# Altium PCB solderStation.PcbDoc
Units mm, origin at the board's own origin, x right, y up, seen from the top; angles counter-clockwise.
Board outline 96 x 82 mm, 2 copper layers (Top Layer, Bottom Layer), stack 1.671 mm thick; 70 components, 77 nets, 218 pads, 10 vias.
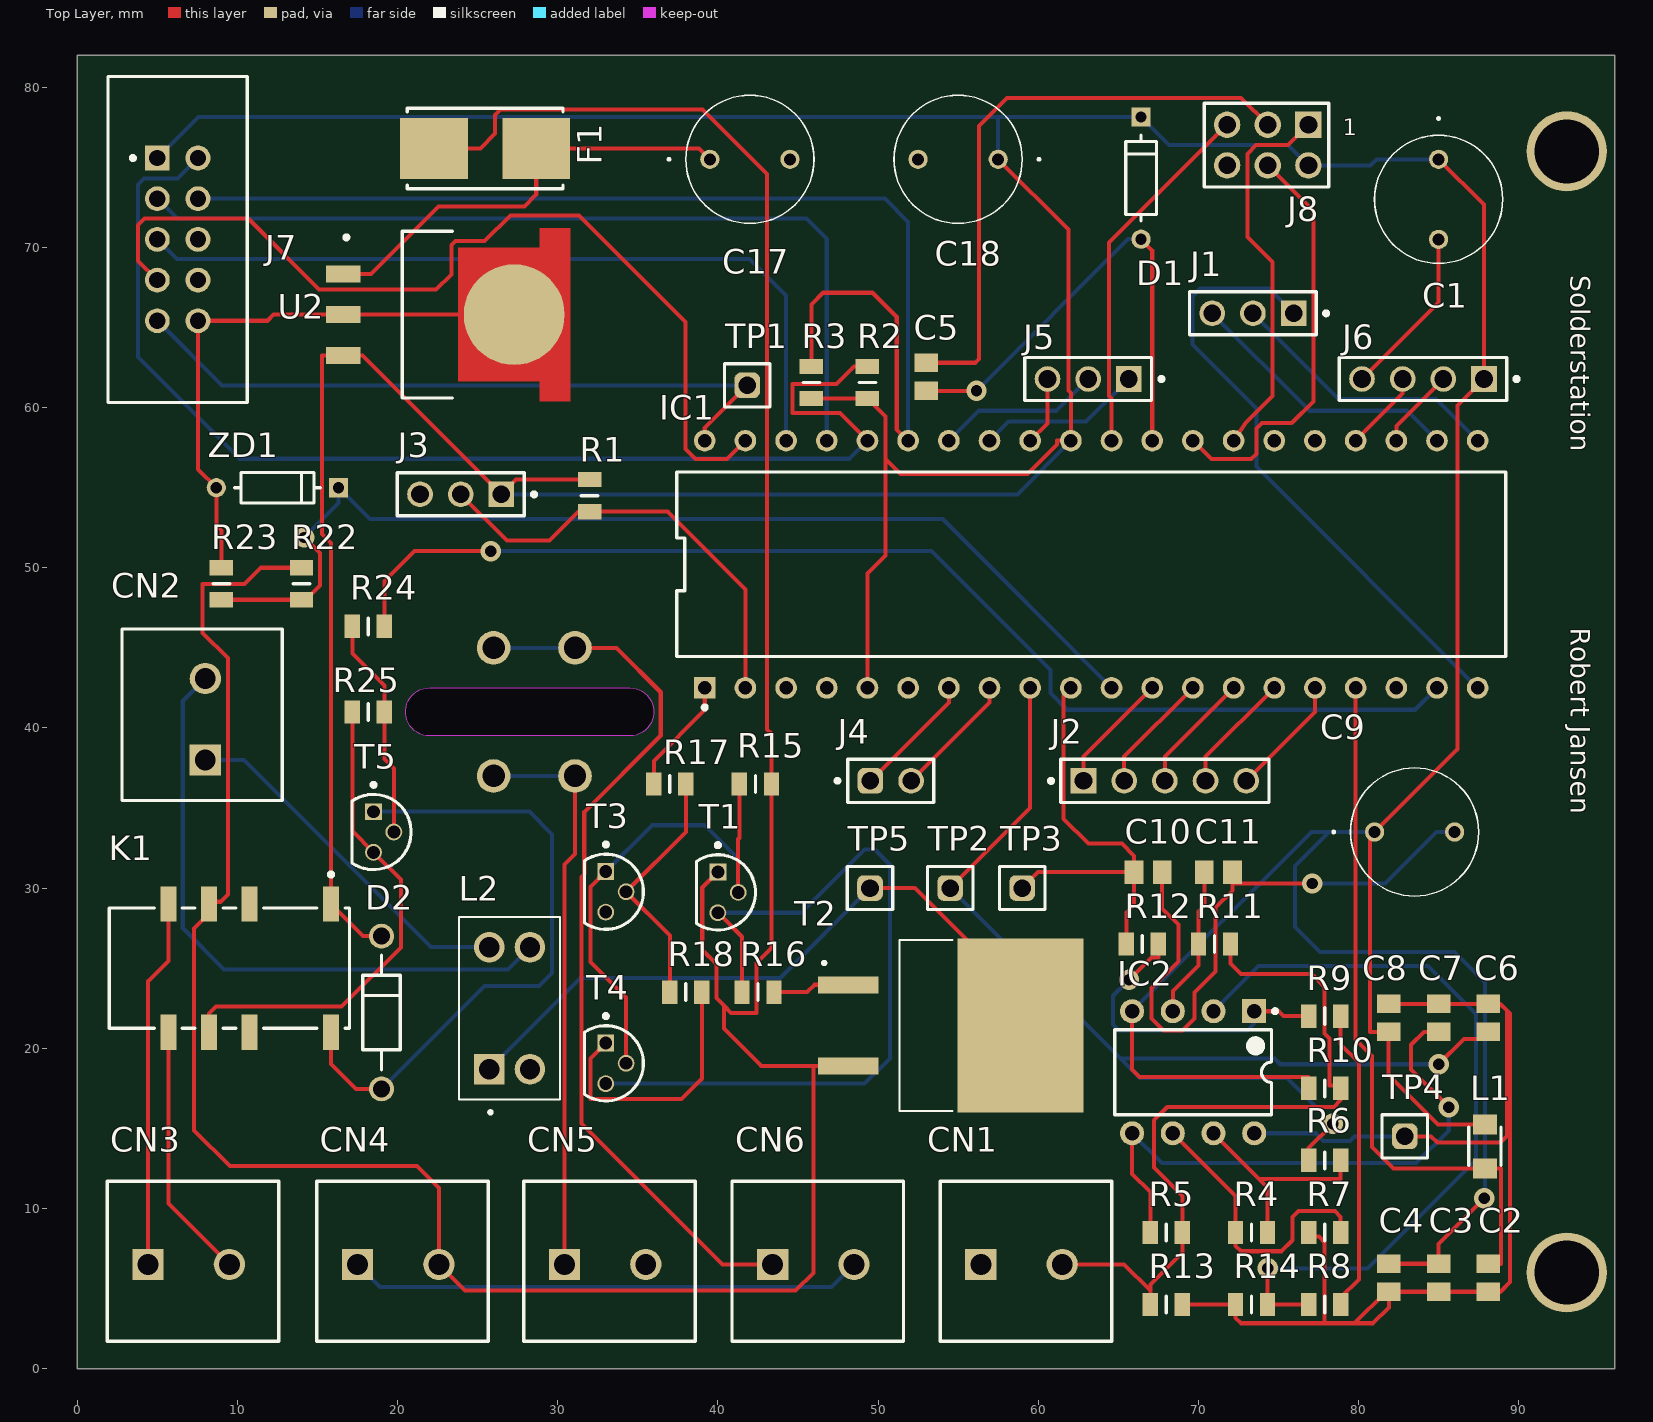
[diagram p0: Top Layer view]
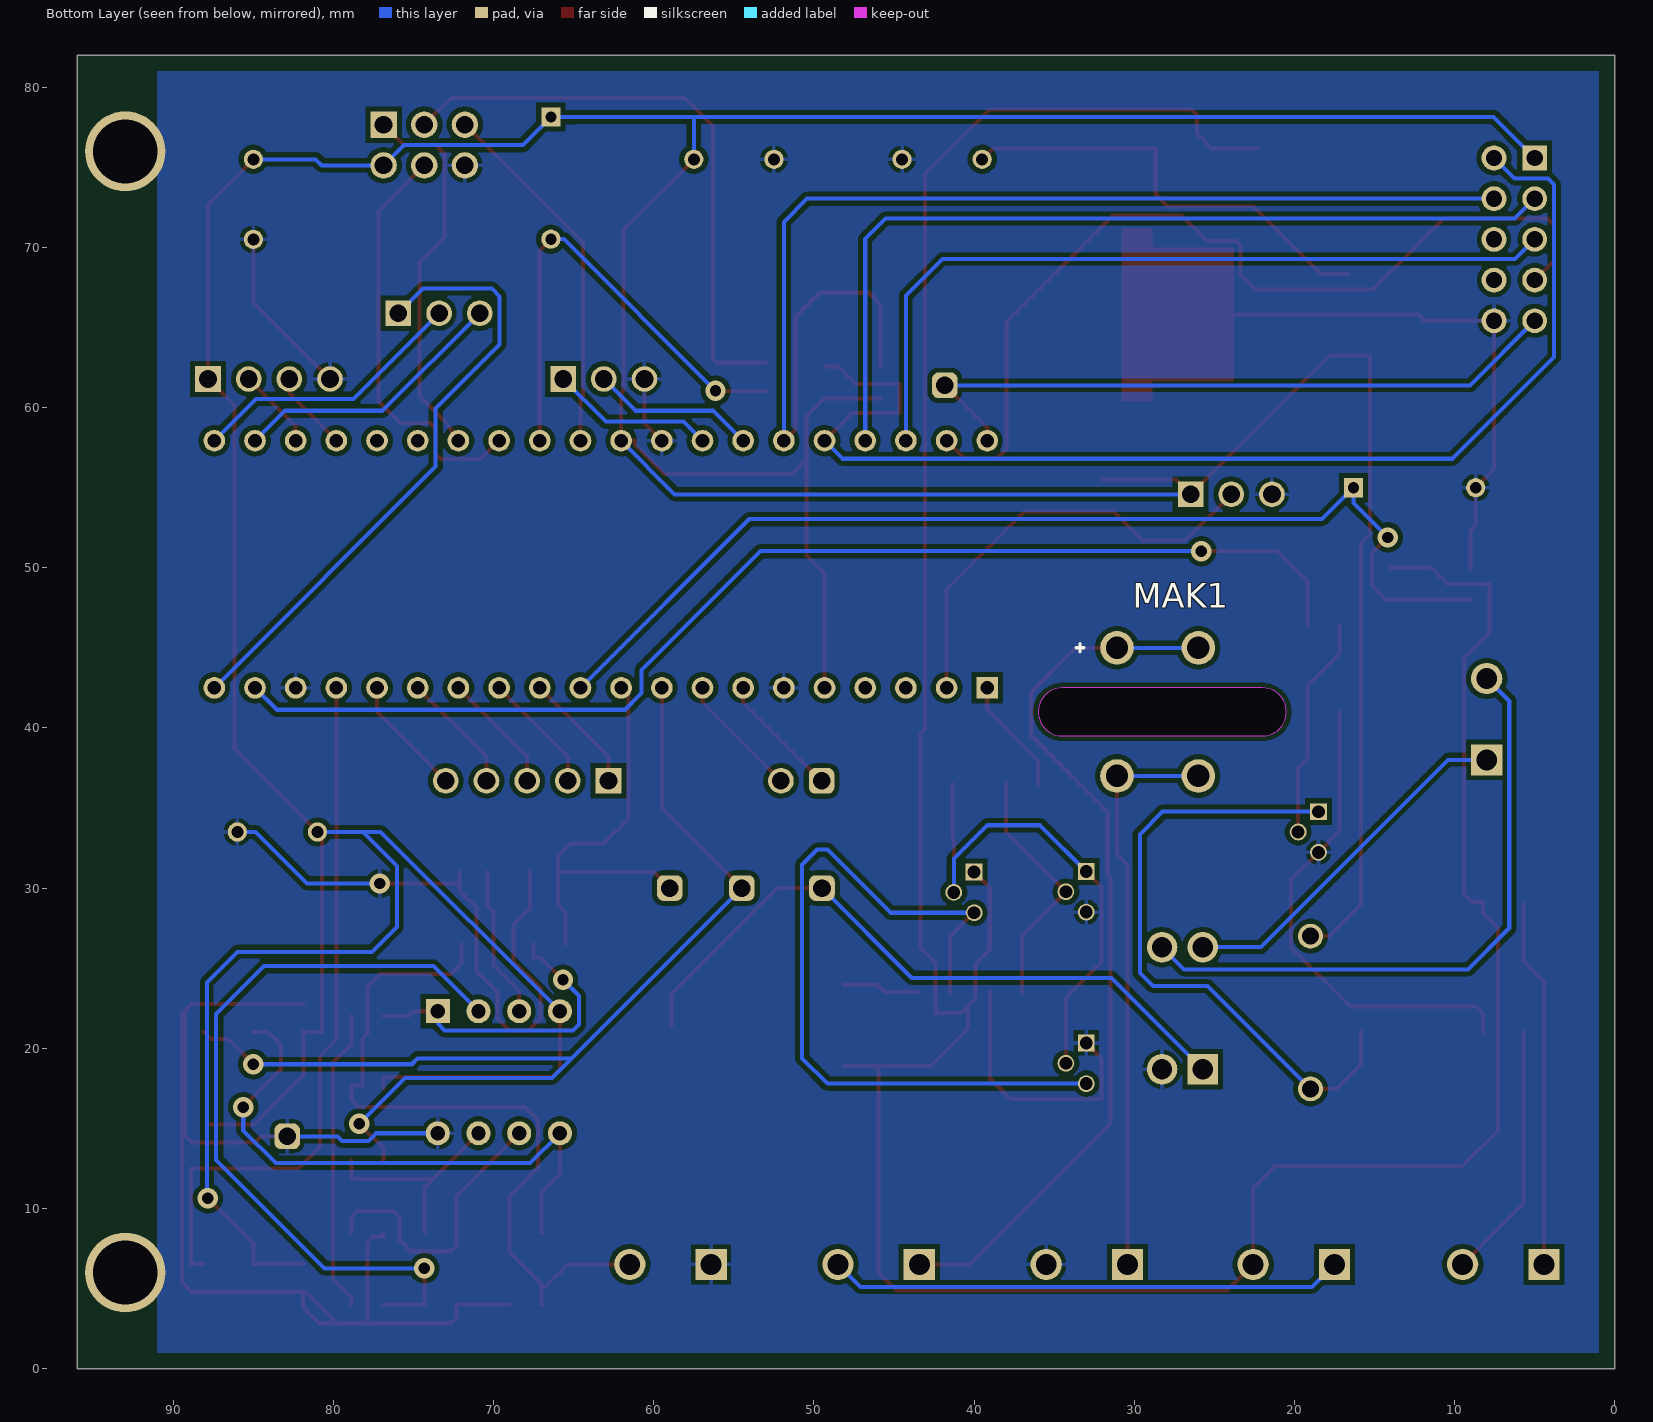
[diagram p1: Bottom Layer view, seen from below]

## Layer stack, top to bottom
Top Solder: solder mask 0.0102, Solder Resist, Dk 3.5
Top Layer: signal copper 0.0356
Dielectric 1: dielectric 1.6, FR-4, Dk 4.8
Bottom Layer: signal copper 0.0356
Bottom Solder: solder mask 0.0102, Solder Resist, Dk 3.5

## Board outline
0,82 96,82 96,0 0,0
cut-out: 22,39.5 cw(c22,41) 22,42.5 34.5,42.5 cw(c34.5,41) 34.5,39.5

## Design rules (kind name [scope] priority, off if disabled: settings)
Clearance [All] p1: gap=0.3 ignorepadtopadclearanceinfootprint=FALSE
Height [All] p1: minheight=0 maxheight=60 prefheight=12.7
HoleSize [All] p1: absolutevalues=TRUE maxlimit=5 minlimit=0.025 maxpercent=80.000 minpercent=20.000
PolygonConnect [All] p1: connectstyle=Relief reliefconductorwidth=0.254 reliefentries=4 polygonreliefangle="90 Angle" airgapwidth=0.254
RoutingVias [All] p1: holewidth=0.711 width=1.27 viastyle="Through Hole" minholewidth=0.711 minwidth=1.27 maxholewidth=0.711 maxwidth=1.27
SilkToSolderMaskClearance [IsPad] p1: minsilkscreentomaskgap=0.1 clearancetoexposedcopper=TRUE
SolderMaskExpansion [All] p1: expansion=0.102 istentingtop=FALSE
Width [All] p1: maxlimit=0.254 minlimit=0.254 preferedwidth=0.254
27 further rules are at their usual default settings.

## Classes and differential pairs
component class SolderIronTemp: C6 C7 C8 C9 C10 C11 CN1 IC2 R4 R5 R6 R7 R8 R9 R10 R11 R12 R13 R14 TP2 TP3 TP4
component class SolderIronOut: CN2 L2 R15 R16 R17 R18 T1 T2 T3 T4 TP5
component class CPU: C1 C2 C3 C4 C5 D1 IC1 J1 J2 J3 J4 J5 J6 J7 J8 L1 R1 R2 R3 TP1
component class BatterySource_RelaisOut: C17 C18 CN3 CN4 CN5 CN6 D2 F1 K1 MAK1 R22 R23 R24 R25 T5 U2 ZD1

## Components (designator, comment, footprint, x,y, rotation, side; value= is the part's Value field where it differs from the comment)
C1 "10µF 50V" TAP106M050BRW 85,75.5 r270 top
C2 "100nF" CAPC2012X88N 88.097,5.67 r90 top
C3 "100nF" CAPC2012X88N 85.018,5.67 r90 top
C4 "100nF" CAPC2012X88N 81.887,5.67 r90 top
C5 "10nF" CAPC2012X88N 53.004,61.922 r270 top
C6 "10nF" CAPC2012X88N 88.097,21.9 r270 top
C7 "10nF" CAPC2012X88N 85.018,21.9 r270 top
C8 "10nF" CAPC2012X88N 81.887,21.9 r270 top
C9 "10µF 50V" TAP106M050BRW 81,33.5 r0 top
C10 "10nF" CAPC2012X88N 66.858,31 r180 top
C11 "10nF" CAPC2012X88N 71.254,31 r180 top
C17 "100µF 25V" TAP106M050BRW 39.5,75.5 r0 top
C18 "10µF 50V" TAP106M050BRW 57.5,75.5 r180 top
CN1 "Printkroonsteen 2 POL" "PRINTKROONSTEEN 2PIN" 56.42,6.5 r0 top
CN2 "Printkroonsteen 2 POL" "PRINTKROONSTEEN 2PIN" 8,38 r90 top
CN3 "Printkroonsteen 2 POL" "PRINTKROONSTEEN 2PIN" 4.42,6.5 r0 top
CN4 "Printkroonsteen 2 POL" "PRINTKROONSTEEN 2PIN" 17.5,6.5 r0 top
CN5 "Printkroonsteen 2 POL" "PRINTKROONSTEEN 2PIN" 30.42,6.5 r0 top
CN6 "On/Off Switch" "PRINTKROONSTEEN 2PIN" 43.42,6.5 r0 top
D1 "1N4148" FP-017AG-MFG 66.425,78.139 r270 top
D2 "1N4007" "DIODE 1N4007 ONSC-AXIAL_LEAD-2-59-10_P" 19,27 r270 top
F1 "3A" FP-0154-MFG 25.474,76.173 r0 top
IC1 "ATMEGA4809-PF" ATMEGA4809-PF 63.31,50.215 r90 top
IC2 "MCP6002-I/P" PDIP300-P8 69.675,18.5 r270 top
J1 "61300311121" "PIN HEADER 1X3" 73.406,65.888 r180 top
J2 "61300511121" "PIN HEADER 1X5" 67.909,36.695 r0 top
J3 "61300311121" "PIN HEADER 1X3" 23.946,54.585 r180 top
J4 "61300211121" 61300211121 50.793,36.695 r0 top
J5 "61300311121" "PIN HEADER 1X3" 63.123,61.784 r180 top
J6 "UART2" "PIN HEADER 1X4" 84.025,61.784 r180 top
J7 "1-1634688-0" TECO-1-1634688-0-10_V 6.27,70.5 r270 top
J8 "61300621121" "PIN HEADER 2X6" 74.333,76.389 r180 top
K1 "G6S-2F-DC5" FP-G6S-2F-DC5-MFG 9.5,25 r180 top
L1 "10uH" SMD-1008 87.887,13.875 r90 top
L2 "CM2545X171B-10" XFMR_CM2545X171B-10 27,22.5 r90 top
MAK1 "Makita battery source" "MAKITA FOODPRINT FEMALE SPADE FOR PCD" 28.565,45 r180 bottom
R1 "4K7" RESC2012X50N 32,54.5 r270 top
R2 "4K7" RESC2012X50N 49.333,61.564 r270 top
R3 "4K7" RESC2012X50N 45.833,61.564 r270 top
R4 "18K" RESC2012X50N 73.325,8.5 r180 top
R5 "5K6" RESC2012X50N 68,8.5 r0 top
R6 "5K6" RESC2012X50N 77.887,13 r0 top
R7 "100E" RESC2012X50N 77.887,8.5 r0 top
R8 "18K" RESC2012X50N 77.887,4 r180 top
R9 "18K" RESC2012X50N 77.887,22 r0 top
R10 "1M" RESC2012X50N 77.887,17.5 r180 top
R11 "5K6" RESC2012X50N 71,26.5 r0 top
R12 "5K6" RESC2012X50N 66.5,26.5 r0 top
R13 "10M" RESC2012X50N 68,4 r180 top
R14 "100E" RESC2012X50N 73.325,4 r0 top
R15 "4K7" RESC2012X50N 42.342,36.5 r0 top
R16 "100E" RESC2012X50N 42.5,23.5 r180 top
R17 "10K" RESC2012X50N 37,36.5 r180 top
R18 "4K7" RESC2012X50N 38,23.5 r180 top
R22 "6K8" RESC2012X50N 13.998,49 r270 top
R23 "10K" RESC2012X50N 9,49 r90 top
R24 "10K" RESC2012X50N 18.175,46.345 r180 top
R25 "4K7" RESC2012X50N 18.175,40.996 r180 top
T1 "BC547B" ONSC-TO-92-3-29-11 40,29.73 r270 top
T2 "IRF9Z34SPBF" TO254P1521X483-4N 54.539,21.422 r0 top
T3 "BC547B" ONSC-TO-92-3-29-11 33,29.77 r270 top
T4 "BC557BTF" ONSC-TO-92-3-29-11 33,19.058 r270 top
T5 "BC547B" ONSC-TO-92-3-29-11 18.5,33.5 r270 top
TP1 "TestPoint" 61300111121 41.833,61.389 r0 top
TP2 "TestPoint" 61300111121 54.5,30 r0 top
TP3 "TestPoint" 61300111121 59,30 r0 top
TP4 "TestPoint" 61300111121 82.887,14.5 r0 top
TP5 "TestPoint" 61300111121 49.5,30 r0 top
U2 "LM7805SX/NOPB" FP-KTT0003B-MFG 23.154,65.8 r270 top
ZD1 "5V1" "ZENERDIODE TH" 12.5,55 r180 top

## Footprints (in the part's own frame and the unit in brackets; to place one, negate y for a bottom-side part, rotate by r counter-clockwise, add the part's x,y. Pads: shape width x height; smd on the part's side, far side on the other; paste and mask are expansions set on the pad)
61300111121 [mm] "Pin Header, pitch 2.54 mm, THT, Vertical, single row, 1p"
  rrect50% 1.6x1.6 hole 1.1: 1(0,0)
  silkscreen extent -1.42,-1.35 1.42,1.34, body extent -1.27,-1.27 1.27,1.27, height 8.57
61300211121 [mm] "Pin Header, pitch 2.54 mm, THT, Vertical, single row, 2p"
  rrect50% 1.6x1.6 hole 1.1: 1(-1.27,0)
  round 1.6 hole 1.1: 2(1.27,0)
  silkscreen extent -3.44,-1.34 2.69,1.35, body extent -2.54,-1.27 2.54,1.27, height 8.57
ATMEGA4809-PF [mm] "FP TH gebruikmaken van socket voor op PCB"
  rect 1.35x1.35 hole 0.85 paste-2539.97 mask+0: 1(-7.715,24.13)
  round 1.35 hole 0.85 paste-2539.97 mask+0: 2(-7.715,21.59) 3(-7.715,19.05) 4(-7.715,16.51) 5(-7.715,13.97) 6(-7.715,11.43) 7(-7.715,8.89) 8(-7.715,6.35) 9(-7.715,3.81) 10(-7.715,1.27) 11(-7.715,-1.27) 12(-7.715,-3.81) 13(-7.715,-6.35) 14(-7.715,-8.89) 15(-7.715,-11.43) 16(-7.715,-13.97) 17(-7.715,-16.51) 18(-7.715,-19.05) 19(-7.715,-21.59) 20(-7.715,-24.13) 21(7.715,-24.13) 22(7.715,-21.59) 23(7.715,-19.05) 24(7.715,-16.51) 25(7.715,-13.97) 26(7.715,-11.43) 27(7.715,-8.89) 28(7.715,-6.35) 29(7.715,-3.81) 30(7.715,-1.27) 31(7.715,1.27) 32(7.715,3.81) 33(7.715,6.35) 34(7.715,8.89) 35(7.715,11.43) 36(7.715,13.97) 37(7.715,16.51) 38(7.715,19.05) 39(7.715,21.59) 40(7.715,24.13)
  silkscreen extent -9.07,-25.88 5.76,25.88, body extent -8.49,-26.71 8.49,26.71, height 0.25
CAPC2012X88N [mm]
  rect 1.16x1.47 smd: 1(-0.875,0) 2(0.875,0)
  body extent -1.02,-0.64 1.02,0.64, height 1.4
"DIODE 1N4007 ONSC-AXIAL_LEAD-2-59-10_P" [mm] "AXIAL, 2-Leads, Diameter 2.35mm"
  round 1.55 hole 1.05: 1(0,0) 2(9.54,0)
  silkscreen extent 1.17,-1.18 8.37,1.17
FP-017AG-MFG [mm]
  rect 1.2x1.2 hole 0.7 paste-2539.97 mask+0: 1(0,0)
  round 1.2 hole 0.7 paste-2539.97 mask+0: 2(7.626,0)
  silkscreen extent 1.13,-0.95 6.49,0.95, body extent -0.7,-1.05 8.33,1.05, height 0.25
FP-0154-MFG [mm]
  rect 4.24x3.81 smd paste+0 mask+0: 1(-3.185,0) 2(3.185,0)
  silkscreen extent -4.87,-2.51 4.87,2.52, body extent -5.41,-2.62 5.41,2.62, height 0.25
FP-G6S-2F-DC5-MFG [mm]
  rect 1x2.2 smd paste+0 mask+0: 1(-6.35,-4) 3(-1.27,-4) 4(1.27,-4) 5(3.81,-4) 8(3.81,4) 9(1.27,4) 10(-1.27,4) 12(-6.35,4)
  silkscreen extent -7.5,-5.97 7.5,3.75, body extent -7.6,-5.2 7.6,5.2, height 0.25
FP-KTT0003B-MFG [mm]
  rect 1.07x2.16 smd paste+0 mask+0: 1(-2.54,-6.545) 2(0,-6.545) 3(2.54,-6.545)
  round 6.291 smd paste+0 mask+0: 4(0,4.13)
  Top Layer region: 5.4,7.625 -5.4,7.625 -5.4,5.715 -4.165,5.715 -4.165,0.635 4.165,0.635 4.165,5.715 5.4,5.715
  silkscreen extent -5.21,-6.47 5.21,0.26, body extent -5.5,-7.73 5.5,7.73, height 0.25
"MAKITA FOODPRINT FEMALE SPADE FOR PCD" [mm] "foodprint of 2 spades used for makita terminal"
  round 2.1 hole 1.4: 1(-2.515,0) 2(2.565,0) 3(2.565,-8) 4(-2.515,-8)
  silkscreen extent -5.08,-0.25 -4.58,0.25, body extent -3.72,-10.54 3.8,2.34, height 9.39
ONSC-TO-92-3-29-11 [mm] "TO, 3-Leads, Body Dia 4.7mm, Pitch 1.27mm"
  rect 1.05x1.05 hole 0.8: 1(-1.27,0)
  round 1.05 hole 0.8: 2(0,1.27) 3(1.27,0)
  silkscreen extent -3.07,-1.34 2.35,2.35, body extent -2.35,-1.33 2.36,2.36, height 7.87
PDIP300-P8 [mm] "8-Pin Plastic Dual In-Line Package (PDIP)"
  rect 1.5x1.5 hole 0.9: 1(-3.81,3.81)
  round 1.5 hole 0.9: 2(-3.81,1.27) 3(-3.81,-1.27) 4(-3.81,-3.81) 5(3.81,-3.81) 6(3.81,-1.27) 7(3.81,1.27) 8(3.81,3.81)
  silkscreen extent -3.93,-4.9 2.65,5.24, body extent -3.55,-4.9 3.55,4.9, height 4.32
"PIN HEADER 1X3" [mm] "Pin Header, pitch 2.54 mm, THT, Vertical, single row, 3p"
  rect 1.6x1.6 hole 1.1: 1(-2.54,0)
  round 1.6 hole 1.1: 2(0,0) 3(2.54,0)
  silkscreen extent -4.7,-1.34 3.96,1.35, body extent -3.81,-1.27 3.81,1.27, height 8.57
"PIN HEADER 1X4" [mm] "Pin Header, pitch 2.54 mm, THT, Vertical, single row, 4p"
  rect 1.6x1.6 hole 1.1: 1(-3.81,0)
  round 1.6 hole 1.1: 2(-1.27,0) 3(1.27,0) 4(3.81,0)
  silkscreen extent -5.97,-1.35 5.23,1.35, body extent -5.08,-1.27 5.08,1.27, height 8.57
"PIN HEADER 1X5" [mm] "Pin Header, pitch 2.54 mm, THT, Vertical, single row, 5p"
  rect 1.6x1.6 hole 1.1: 1(-5.08,0)
  round 1.6 hole 1.1: 2(-2.54,0) 3(0,0) 4(2.54,0) 5(5.08,0)
  silkscreen extent -7.24,-1.34 6.5,1.35, body extent -6.35,-1.27 6.35,1.27, height 8.57
"PIN HEADER 2X6" [mm] "Pin Header, pitch 2.54 mm, THT, Vertical, dual row, 6p"
  rect 1.65x1.65 hole 1.1: 1(-2.54,-1.27)
  round 1.65 hole 1.1: 2(-2.54,1.27) 3(0,-1.27) 4(0,1.27) 5(2.54,-1.27) 6(2.54,1.27)
  silkscreen extent -3.81,-2.62 3.96,2.61, body extent -3.81,-2.54 3.81,2.54, height 8.59
"PRINTKROONSTEEN 2PIN" [mm] "printkroonsteen 2pin 1716020000"
  rect 1.95x1.95 hole 1.3: 1(0,0)
  round 1.95 hole 1.3: 2(5.08,0)
  silkscreen extent -2.54,-4.8 8.17,5.2, body extent -2.54,-4.8 8.17,5.2, height 13.8
RESC2012X50N [mm]
  rect 0.95x1.45 smd: 1(-1,0) 2(1,0)
  silkscreen extent 0,-0.53 0,0.52, body extent -1.02,-0.63 1.02,0.63, height 0.5
SMD-1008 [mm] "Chip Inductor, 2-Leads, Body 2.5 x 2.0 mm"
  rect 1.25x1.5 smd: 1(-1.375,0) 2(1.375,0)
  silkscreen extent -1.2,-1 1.2,1, body extent -1.25,-1 1.25,1, height 0.89
TAP106M050BRW [mm]
  round 1.2 hole 0.75: 1(0,0) 2(5,0)
  silkscreen extent -2.6,-4 6.5,4
TECO-1-1634688-0-10_V [mm] "10-Pin Connector, Body 20.35x8.7mm, Pitch 2.54mm"
  rect 1.55x1.55 hole 1.02: 1(-5.08,-1.27)
  round 1.55 hole 1.02: 2(-5.08,1.27) 3(-2.54,-1.27) 4(-2.54,1.27) 5(0,-1.27) 6(0,1.27) 7(2.54,-1.27) 8(2.54,1.27) 9(5.08,-1.27) 10(5.08,1.27)
  silkscreen extent -10.18,-4.35 10.18,4.35, body extent -10.17,-4.35 10.18,4.65, height 9
TO254P1521X483-4N [mm]
  rect 3.78x1.06 smd: 1(-6.4,2.54) 3(-6.4,-2.54)
  rect 7.88x10.84 smd paste-6: 4(4.35,0)
  silkscreen extent -8,-5.34 0.1,5.34
XFMR_CM2545X171B-10 [mil]
  rect 75x75 hole 50: 1(-150,50)
  round 75 hole 50: 2(-150,-50) 3(150,-50) 4(150,50)
  silkscreen extent -260,-124 224,124, body extent -224,-124 224,124, height 374
"ZENERDIODE TH" [mm] "zenerdiode TH 500mW"
  rect 1.2x1.2 hole 0.7 paste-2539.97 mask+0: 1(-3.813,0)
  round 1.2 hole 0.7 paste-2539.97 mask+0: 2(3.813,0)
  silkscreen extent -2.68,-0.96 2.68,0.96, body extent -4.51,-1.05 4.51,1.05, height 0.25

## Part data
C1 C9 C17 C18: library part "capacitor THT radial tantalum", "Tantalum Capacitors - Solid Leaded 50V 10uF 20% ESR=1.6 Ohm TAP106M050BRW", Manufacturer_Name="Kyocera AVX", Manufacturer_Part_Number=TAP106M050BRW, Mouser Part Number=581-TAP106M050BRW, Datasheet Link=https://www.mouser.be/datasheet/2/40/tap-776819.pdf, Geometry.Height=15.5mm, Mouser Price/Stock=https://www.mouser.co.uk/ProductDetail/AVX/TAP106M050BRW?qs=GjEaAqXp9rZGx11KfVU76g%3D%3D
C2 C3 C4 C5 C6 C7 C8 C10 C11: library part "Capacitor ceramic 0805", Manufacturer=Kemet, Part Number=C0402C104K4RACTU
CN1 CN2 CN3 CN4 CN5 CN6: library part "printkroonsteen 1 X 2", "Printkroonsteen 2 PO L1716020000", Manufacturer_Name=Weidmuller, Manufacturer_Part_Number=1716020000, Mouser Part Number=470-1716020000, Datasheet Link=https://catalog.weidmueller.com/catalog/Start.do?ObjectID=1716020000&_ga=2.21797499.1716783809.1613378202-511725545.1613378202, Mouser Price/Stock=https://www.mouser.co.uk/ProductDetail/Weidmuller/1716020000?qs=WJDKaGZ8K%252B7GSEFQgvMjVA%3D%3D
D1: library part "D 1N4148", "DIODE GEN PURP 100V 200MA DO35", Average Rectified Current=200mA, Capacitance=4pF, Case/Package=DO-35, Current=4A, Forward Current=300mA, Forward Voltage=1V, Max Forward Surge Current (Ifsm)=1A, Max Operating Temperature=175°C, Max Power Dissipation=500mW, Max Repetitive Reverse Voltage (Vrrm)=100V, Max Reverse Current=5uA, Min Operating Temperature=-65°C, Package Quantity=2000, Contact Plating=Tin, Current Rating=200mA, Diameter=1.91mm, Element Configuration=Single, Height=4.56mm, Lead Free="Lead Free", Length=4.56mm, Max Reverse Voltage (DC)=100V, Max Surge Current=4A, Mount="Through Hole", Number of Pins=2, Output Current=200mA, Outside Diameter=1.85mm, Packaging=Bulk, Peak Non-Repetitive Surge Current=4A, Polarity=Standard, Power Dissipation=500mW, Radiation Hardening=No, REACH SVHC="No SVHC", Recovery Time=4ns, Reverse Recovery Time=4ns, Reverse Voltage=100V, Series=-, Voltage=100V, Voltage Rating (DC)=100V, Weight=0.01lb, Width=1.91mm
D2: library part "DIODE 1N4007", "DIODE 1N4007 1A 1000V", Manufacturer="On Semiconductor", ComponentLink1Description="Manufacturer URL", ComponentLink1URL=http://www.onsemi.com/, ComponentLink2Description=Datasheet, ComponentLink2URL=http://www.onsemi.com/pub_link/Collateral/1N4001-D.PDF, ComponentLink3Description="Package Specification", ComponentLink3URL=http://www.onsemi.cn/pub_link/Collateral/59-10.PDF, DatasheetVersion="Rev. 13", IFSM Max (A)=30, IO(rec) Max (A)=1, Mounting Technology="Through Hole", PackageDescription="2-Pin, Axial Lead, Diameter 2.35 mm", PackageReference=AXIAL_LEAD-2-59-10, PackageVersion="Rev. U, 02/2005", Packing="Bulk Bag", PartNumber=1N4007, RoHS=TRUE, Type="Standard Recovery", VRRM Max (V)=1000
F1: library part Fuse, "FUSE BRD MNT 4A 125VAC/VDC 2SMDCMP-08605-000003-1", Fuse Current=4A, Manufacturer=Littelfuse, Manufacturer Part Number=0154004.DR, Max Fuse Ac Voltage=125V, Package=0154, Temperature="-55°C to +125°C", Temperature Range High=+125°C, Temperature Range Low=-55°C, Automotive=No, Category=Fuse, ComponentLink2Description=Datasheet, ComponentLink2URL=https://www.littelfuse.com/~/media/electronics/datasheets/fuses/littelfuse_fuse_154_154t_154l_154tl_datasheet.pdf.pdf, Device Class L1="Circuit Protection", Device Class L2=Fuses, Device Class L3=unset, Digikey Description="FUSE BRD MNT 4A 125VAC/VDC 2SMD", Fuse Blow Speed=Fast, Height=3.81mm, Lead Free=Yes, Max Fuse Dc Voltage=125V, Mouser Description="Surface Mount Fuses Fuseblock w/ fuse 4A OMNI BLOK 154", Octopart=https://octopart.com/0154004.dr-littelfuse-565861, RoHS=TRUE
IC1: "IC MCU 8BIT 48KB FLASH 40DIP", RoHS Compliant=Yes
IC2: library part CMP-0187-00119-3, "Dual opamp", Case/Package=PDIP, Input Bias Current=1pA, Input Offset Voltage (Vos)=4.5mV, Max Frequency=1kHz, Max Input Voltage=6V, Max Operating Temperature=85°C, Min Input Voltage=1.8V, Min Operating Temperature=-40°C, Nominal Supply Current=100uA, Operating Supply Voltage=5.5V, Output Current=23mA, Package Quantity=60, Power Supply Rejection Ratio (PSRR)=86dB, Voltage Gain=112dB, Amplifier Type="GENERAL PURPOSE", Bandwidth=1MHz, Common Mode Rejection Ratio=60dB, Gain Bandwidth Product=1MHz, Height=0.195inch, Input Offset Voltage-Max=4.5mV, Lead Free="Lead Free", Length=0.4inch, Max Supply Voltage=6V, Min Supply Voltage=1.8V, Mount="Through Hole", Number of Amplifiers=2, Number of Channels=2, Number of Circuits=2, Number of Elements=2, Number of Pins=8, Operating Supply Current=100uA, Output Current per Channel=23mA, Packaging=Rail/Tube, Radiation Hardening=No, REACH SVHC="No SVHC", RoHS Compliant=Yes, Slew Rate=0.6V/µs, Slew Rate-Nom=0.6V/µs, Supply Current=100uA, Technology=CMOS, Unity Gain Bandwidth Product=1MHz, Width=0.28inch
J1 J3: library part "pin header 1x3pin right connection", "THT Vertical Pin Header WR-PHD, Pitch 2.54 mm, Single Row, 3 pins", Contact Resistance=20mOhm, Manufacturer="Wurth Elektronik", Operating Temperature=-40to105degC, Rated Current=3A, Withstanding Voltage=500VAC, Working Voltage=250VAC, Datasheet URL=https://katalog.we-online.de/em/datasheet/6130xx11121.pdf, Gender=Male, Manufacturer URL=http://www.we-online.de, Mounting Technology=THT, Orientation=Vertical, Package Reference=61300311121, Packaging=Bag, Part Number=61300311121, Pin Number=3, Pitch=2.54mm, Publisher=WurthElektronik, Row Number=Single
J2: library part "pin header 1x5", "THT Vertical Pin Header WR-PHD, Pitch 2.54 mm, Single Row, 5 pins", Contact Resistance=20mOhm, Manufacturer="Wurth Elektronik", Operating Temperature=-40to105degC, Rated Current=3A, Withstanding Voltage=500VAC, Working Voltage=250VAC, Datasheet URL=https://katalog.we-online.de/em/datasheet/6130xx11121.pdf, Gender=Male, Manufacturer URL=http://www.we-online.de, Mounting Technology=THT, Orientation=Vertical, Package Reference=61300511121, Packaging=Bag, Part Number=61300511121, Pin Number=5, Pitch=2.54mm, Publisher=WurthElektronik, Row Number=Single
J4: library part "Pin header 1X2 right connection", "THT Vertical Pin Header WR-PHD, Pitch 2.54 mm, Single Row, 2 pins", Color=Black, Contact Resistance=20mΩ, Current Rating=3A, Max Operating Temperature=125°C, Min Operating Temperature=-40°C, Operating Supply Voltage=250V, Connector Type="Male Pin", Contact Gender=Male, Contact Material=Copper, Contact Mating Length=5.9944mm, Contact Plating=Gold, Gender=Male, Height=8.94mm, Housing Material=PBT, Lead Free="Lead Free", Lead Pitch=2.54mm, Mount="Through Hole", NexarPartId=20081794, Number of Contacts=2, Number of Pins=2, Number of Positions=2, Number of Rows=1, Orientation=Vertical, Packaging=Bulk, Pitch=2.54mm, REACH SVHC="No SVHC", RoHS=Compliant, Termination="Through Hole", Voltage Rating=250V
J5: library part "pin header 1x3pin", "THT Vertical Pin Header WR-PHD, Pitch 2.54 mm, Single Row, 3 pins", Contact Resistance=20mOhm, Manufacturer="Wurth Elektronik", Operating Temperature=-40to105degC, Rated Current=3A, Withstanding Voltage=500VAC, Working Voltage=250VAC, Datasheet URL=https://katalog.we-online.de/em/datasheet/6130xx11121.pdf, Gender=Male, Manufacturer URL=http://www.we-online.de, Mounting Technology=THT, Orientation=Vertical, Package Reference=61300311121, Packaging=Bag, Part Number=61300311121, Pin Number=3, Pitch=2.54mm, Publisher=WurthElektronik, Row Number=Single
J6: library part "pin header 1x4 right connection", "THT Vertical Pin Header WR-PHD, Pitch 2.54 mm, Single Row, 4 pins", Contact Resistance=20mOhm, Manufacturer="Wurth Elektronik", Operating Temperature=-40to105degC, Package Reference=61300411121, Rated Current=3A, Withstanding Voltage=500VAC, Working Voltage=250VAC, Datasheet URL=https://katalog.we-online.de/em/datasheet/6130xx11121.pdf, Gender=Male, Manufacturer URL=http://www.we-online.de, Mounting Technology=THT, Orientation=Vertical, Packaging=Bag, Part Number=61300411121, Pin Number=4, Pitch=2.54mm, Publisher=WurthElektronik, Row Number=Single
J7: library part CMP-2000-05854-1, "Male Header, Pitch 2.54 mm, 2 x 5 Postion, Height 9.15 mm, Tail Length 3.2 mm, -40 to 105 degC, RoHS, Bulk", Manufacturer="TE Connectivity", Package Description="10-Pin Connector, Body 20.35 x 8.7 mm, Pitch 2.54 mm", Package Version="Rev. C2, 02/2011", Contact Material=Brass, Contact Plating=GoldPlatedContacts, Contact Termination Type=ThroughHole, Datasheet URL=https://datasheet.ciiva.com/6831/eng-cd-1634688-c2-6831201.pdf, Datasheet Version="Rev. C2, 02/2011", Gender=Header, Manufacturer URL=http://www.te.com/, Mounting Technology=ThroughHole, No. of Contacts=10Contacts, No. of Positions=10, No. of Rows=2, Orientation=Straight, Package Reference=1-1634688-0, Package URL=https://datasheet.ciiva.com/6831/eng-cd-1634688-c2-6831201.pdf, PartNumber=1-1634688-0, Pitch=2.54mm, Pitch Spacing=2.54mm, Product Range=-, SVHC=ToBeAdvised
J8: library part "pin header 2x6", "THT Vertical Pin Header WR-PHD, Pitch 2.54 mm, Dual Row, 6 pins", Contact Resistance=20mOhm, Manufacturer="Wurth Elektronik", Operating Temperature=-40to105degC, Rated Current=3A, Withstanding Voltage=500VAC, Working Voltage=250VAC, Datasheet URL=https://katalog.we-online.de/em/datasheet/6130xx21121.pdf, Gender=Male, Manufacturer URL=http://www.we-online.de, Mounting Technology=THT, Orientation=Vertical, Package Reference=61300621121, Packaging=Bag, Part Number=61300621121, Pin Number=6, Pitch=2.54mm, Publisher=WurthElektronik, Row Number=Dual
K1: library part "relais 5V 2A", "RELAY TELECOM DPDT 2A 5V DCCMP-08823-000012-1", Ambient Temperature Range High=+85°C, Ambient Temperature Range Low=-40°C, Coil Current=28.1mA, Coil Power=140mW, Coil Resistance=178Ω, Coil Voltage=5V, Current Rating=2A, Manufacturer=Omron, Temperature="-40°C to +85°C", Automotive=No, Category=Relay, Coil Type=Non-Latching, ComponentLink2Description=Datasheet, ComponentLink2URL=https://omronfs.omron.com/en_US/ecb/products/pdf/en-g6s.pdf, Device Class L1=Electromechanical, Device Class L2=Relays, Device Class L3="Signal Relays", Digikey Description="RELAY TELECOM DPDT 2A 5VDC", Height=9.4mm, Lead Free=Yes, Manufacturer Part Number=G6S-2F-DC5, Mouser Description="Electromechanical Relay 5VDC 178Ohm 2A DPDT (14.8x9.2x9.2)mm SMD Signal Relay", Number of Contacts=2, Octopart=https://octopart.com/g6s-2f-dc5-omron-85236, Package=G6S-2F-DC5, RoHS=TRUE, Standoff Height=0.35mm, Switching Current=2A, Temperature Range High=+85°C, Temperature Range Low=-40°C, Throw Configuration=DPDT
L1: library part "Choke SMD 10uH", "Power Multilayer Inductor WE-PMI, L = 10.00 µH CMP-0227-00001-1", Inductance="10.00 ÂµH", ComponentLink1Description="Manufacturer Link", ComponentLink1URL=http://www.we-online.com, ComponentLink2Description=Datasheet, ComponentLink2URL=http://www.we-online.de/katalog/media/pdf/74479887310.pdf, DatasheetVersion="ver 3, Aug-2009", PackageDescription="Chip Inductor, 2-Leads, Body 2.5 x 2.0 mm", PackageReference=SMD-1008, PackageVersion=2008
L2: "2 Line Common Mode Choke Through Hole 170 Ohms @ 100 MHz 10A DCR 10mOhm", Package="Vertical-4 Laird", Availability="In Stock", Check_prices=https://www.snapeda.com/parts/CM2545X171B-10/Laird/view-part/?ref=eda, MF=Laird, MP=CM2545X171B-10, Price=None, Purchase-URL=https://pricing.snapeda.com/search/part/CM2545X171B-10/?ref=eda, SnapEDA_Link=https://www.snapeda.com/parts/CM2545X171B-10/Laird/view-part/?ref=snap
MAK1: "complete set-up for bettery makita terminal p/n 644808-8"
R1 R2 R3 R4 R5 R6 R7 R8 R9 R10 R11 R12 R13 R14 R15 R16 R17 R18 R22 R23 R24 R25: library part "resistor 0805", Manufacturer="Vishay Dale", Part Number=CRCW08050000Z0EA
T1 T3 T5: library part "Transistor NPN BC547B THT", "Amplifier Transistor, NPN Silicon, 3-Pin TO-92, Bulk Box CMP-1048-01467-1", Manufacturer="On Semiconductor", ComponentLink1Description="Manufacturer URL", ComponentLink1URL=http://www.onsemi.com/, ComponentLink2Description=Datasheet, ComponentLink2URL=http://www.onsemi.com/pub_link/Collateral/BC546-D.PDF, ComponentLink3Description="Package Specification", ComponentLink3URL=http://www.onsemi.cn/pub_link/Collateral/2N6426-D.PDF, DatasheetVersion="Rev. 7", fT Min (MHz)=150, IC Continuous (A)=0.1, Mounting Technology="Through Hole", PackageDescription="3-Pin Transistor Outline, Body 4.825 x 3.685 mm, Pitch 1.27 mm", PackageReference=TO-92-3-29-11_AM_SL, PackageVersion="Rev. AM", Packing="Bulk Box", PartNumber=BC547B, Polarity=NPN, RoHS=FALSE
T2: "P-Channel 60V 18A _Tc_ 3.7W _Ta_, 88W _Tc_ Surface Mount D2PAK", Package="D2PAK Vishay", Availability=Unavailable, MF=Vishay, MP=IRF9Z34SPBF, Price=None, SnapEDA_Link=https://www.snapeda.com/parts/IRF9Z34SPBF/Vishay%20Siliconix/view-part/390212/?ref=snap
T4: library part "Transistor PNP BC557 THT", "BC557BTF Small Signal Bipolar Transistor, 0.1A I(C), 45V V(BR)CEO, 1-Element, PNP, Silicon, TO-92 CMP-00278-84408945-1", Case/Package=TO-92, Collector Base Voltage (VCBO)=-50V, Collector Emitter Breakdown Voltage=45V, Collector Emitter Saturation Voltage=-250mV, Current Rating=-100mA, Emitter Base Voltage (VEBO)=-5V, Frequency=150MHz, Manufacturer Lifecycle Status=ACTIVE, Max Collector Current=100mA, Max Frequency=10MHz, Max Operating Temperature=150°C, Max Power Dissipation=500mW, Min Operating Temperature=-65°C, Voltage Rating (DC)=-45V, Collector Emitter Voltage (VCEO)=45V, Contact Plating=Tin, Element Configuration=Single, Gain Bandwidth Product=150MHz, Height=5.33mm, hFE Min=110, Lead Free="Lead Free", Length=5.2mm, Lifecycle Status=Production, Max Breakdown Voltage=45V, Mount="Through Hole", NexarPartId=84408945, Number of Elements=1, Number of Pins=3, Polarity=PNP, Power Dissipation=500mW, REACH SVHC="No SVHC", RoHS=Compliant, Schedule B="8541210080, 8541210080|8541210080|8541210080|8541210080|8541210080", Transition Frequency=150MHz, Weight=240mg, Width=4.19mm
TP1 TP2 TP3 TP4 TP5: Color=Black, Contact Resistance=20mΩ, Current Rating=3A, Operating Supply Voltage=250V, Connector Type="Male Pin", Contact Material=Copper, Contact Mating Length=5.9944mm, Contact Plating=Gold, Gender=Male, Lead Pitch=2.54mm, Mount="Through Hole", NexarPartId=32855518, Number of Contacts=1, Number of Pins=1, Number of Positions=1, Number of Rows=1, Orientation=Vertical, Packaging=Bulk, REACH SVHC=Unknown, RoHS=Compliant, Termination=Solder
U2: library part "VoltageRed LM7805 SMD", "IC REG LIN 5V 1.5A DDPAK/TO263-3 CMP-2000-07590-2", Ambient Temperature Range High=+125°C, Ambient Temperature Range Low=0°C, Dropout Voltage=2V, Manufacturer="Texas Instruments", Max Junction Temp=+150°C, Max Supply Voltage=30V, Min Supply Voltage=7.5V, Nominal Supply Current=8mA, Output Current=1.5A, Output Voltage=5V, Package=KTT0003B, Temperature="0°C to +125°C", Accuracy Percentage=3%, Automotive=No, Category=IC, ComponentLink2Description=Datasheet, ComponentLink2URL=http://www.ti.com/lit/ds/symlink/lm7800.pdf, Device Class L1="Integrated Circuits (ICs)", Device Class L2="Power Management ICs", Device Class L3="Voltage Regulators - Linear", Digikey Description="IC REG LIN 5V 1.5A DDPAK/TO263-3", Height=4.79mm, Lead Free=Yes, Manufacturer Part Number=LM7805SX/NOPB, Mouser Description="1.5-A, Wide VIN Fixed Voltage Regulators 3-DDPAK/TO-263 0 to 0", Number Of Outputs=1, Octopart=https://octopart.com/lm7805sx%2Fnopb-texas+instruments-74629994, Output Type=Fixed, RoHS=TRUE, Standoff Height=0mm, Temperature Range High=+125°C, Temperature Range Low=0°C
ZD1: library part ZenerDiode, "Series 500 mW 5.1 V 200 mA Through Hole Zener Diode - DO-35", Breakdown Voltage=9.1V, Case/Package=Axial, Forward Voltage=1.2V, Manufacturer Lifecycle Status=ACTIVE, Max Junction Temperature (Tj)=200°C, Max Power Dissipation=500mW, Max Reverse Leakage Current=3µA, Min Operating Temperature=-65°C, Reverse Voltage=7V, Test Current=20mA, Tolerance=5%, Contact Plating=Tin, Element Configuration=Single, ESD Protection=No, Height=1.91mm, Impedance=10Ω, Lead Free="Lead Free", Length=6.35m, Lifecycle Status=Production, Max Operating Temperature=200°C, Mount="Through Hole", NexarPartId=13696926, Number of Pins=2, Packaging=Bulk, Peak Reverse Current=3µA, Power Dissipation=500mW, Power Rating=500mW, Radiation Hardening=No, REACH SVHC="No SVHC", RoHS=Compliant, Schedule B="8541100050, 8541100050|8541100050|8541100050|8541100050|8541100050", Voltage Rating (DC)=9.1V, Voltage Tolerance=5%, Weight=80g, Width=6.35m, Working Voltage=9.1V, Zener Current=20mA, Zener Voltage=9.1V

## Free pads (board coordinates)
  round 5 hole 4: 16(93,76) 17(93,6)

## Via types
v1: diameter 1.27, hole 0.711, Top Layer to Bottom Layer, 10 vias

## Nets (pads, with @x,y where several pads share a name; then routed paths per layer and width w, separated by ;. In a path a pad name is that pad's centre, name@x,y a point inside that pad or via, vN(x,y) a via of type N, cw(c..) or ccw(c..) an arc to the next point about the centre after c; other vN are vias at no path point)
+5: C1.1 C3.2 C4.2 C8.2 C9.1 C18.1 D1.1 D2.1 IC1.5 IC1.31 IC2.4 J3.1 J6.1 J7.1 J8.2 K1.1 L1.2 R1.1 R2.2 R3.2 R10.2 U2.3 | length 390.8
  Top Layer w0.254: D2.1 17.85,27 K1.1 15.85,51.54 15.276,52.113 15.276,63.26 U2.3 17.811,63.26 J3.1 27.401,55.5 R1.1 ; R3.2 R2.2 50.455,59.442 50.455,56.78 ; IC1.5 49.34,49.645 50.455,50.76 50.455,56.78 ; C18.1 61.885,71.115 61.885,61.075 62.04,60.92 IC1.31 61.174,57.931 61.174,57.694 59.32,55.84 51.395,55.84 50.455,56.78 ; IC2.4 65.865,18.663 66.33,18.197 76.887,18.197 R10.2 ; C4.2 C3.2@84.999,6.545 ; C8.2 C8.2@81.875,21.025 ; C1.1 87.834,72.666 J6.1 86.168,60.117 86.168,38.668 C9.1 80.707,33.5 80.707,21.025 C8.2@81.875,21.025 ; C3.2 C3.2@84.999,6.545 ; v1(87.844,10.628) 84.999,7.783 C3.2@84.999,6.545 ; L1.2 84.95,15.25 81.875,18.325 C8.2@81.875,21.025
  Bottom Layer w0.254: J7.1 7.561,78.141 64.857,78.139 ; J3.1 58.694,54.585 IC1.31 ; C18.1 57.5,78.139 64.857,78.139 ; IC2.4 77.055,33.5 78.153,33.5 ; C9.1 78.153,33.5 ; C1.1 81.113,75.5 80.732,75.119 J8.2 75.604,76.389 68.175,76.389 D1.1 64.857,78.139 ; v1(87.844,10.628) 87.895,10.679 87.895,24.116 85.99,26.021 77.583,26.021 76.033,27.57 76.033,31.38 78.153,33.5
GND: C1.2 C2.1 C3.1 C4.1 C6.1 C7.1 C8.1 C9.2 C10.1 C11.1 C17.2 C18.2 CN1.1 CN5.2 IC1.6 IC1.18 IC1.32 IC2.8 J3.3 J5.3 J6.4 J7.10 J8.6 K1.9 L2.2 pad.16 pad.17 R7.1 R13.1 R14.1 R18.1 R23.2 R25.2 T3.3 T4.1 T5.3 TP4.1 U2.2 U2.4 ZD1.2 | length 218.7
  Top Layer w0.254: K1.9 8.23,22.173 8.664,22.606 16.51,22.606 20.204,26.3 20.204,30.526 T5.3 17.175,33.555 R25.2 ; R23.2 9,52.335 8.687,52.648 ZD1.2 7.54,56.147 J7.10 11.873,65.42 12.253,65.8 U2.2 U2.4 ; T4.1 32.04,19.369 32.04,16.826 37.73,16.826 39,18.096 R18.1 ; IC1.32 60.583,59.013 J5.3 ; C10.1 67.733,28.733 68.75,27.716 68.75,25.429 67.081,23.76 67.081,21.855 67.817,21.118 69.023,21.118 69.759,21.855 69.759,23.481 71.08,24.801 71.08,28.782 72.129,29.831 C11.1@72.129,30.288 ; R13.1 R14.1 72.325,3.16 72.655,2.83 77.887,2.83 ; C11.1 C11.1@72.129,30.288 ; R7.1 76.887,8.241 77.532,8.241 77.887,7.885 77.887,2.83 ; v1(77.1,30.288) C11.1@72.129,30.288 ; J6.4 85,66.57 C1.2 ; C8.1 C7.1 C6.1 88.848,22.775 89.267,22.356 ; TP4.1 84.531,14.5 84.923,14.108 88.848,14.108 89.267,14.527 89.267,22.356 ; 77.887,2.83 79.758,2.83 ; 79.758,2.83 80.91,2.83 81.901,3.821 C4.1@81.901,4.795 ; 79.758,2.83 81.723,4.795 C4.1 C4.1@81.901,4.795 ; C4.1@81.901,4.795 C3.1 C2.1 88.848,4.795 89.46,5.408 89.46,22.162 89.267,22.356
  Bottom Layer w0.254: IC2.8 77.338,14.69 77.814,14.214 79.462,14.214 79.748,14.5 TP4.1 ; v1(77.1,30.288) 81.647,30.288 84.859,33.5 C9.2
NetC2_2: C2.2 IC1.17 L1.1 | length 44.5
  Top Layer w0.254: IC1.17 79.82,20.532 80.834,19.518 80.834,13.846 82.18,12.5 L1.1 88.906,12.5 88.906,6.545 C2.2
NetC5_1: C5.1 J8.3 | length 37.4
  Top Layer w0.254: C5.1 56.069,62.797 56.297,63.026 56.297,77.583 58.05,79.335 72.657,79.335 J8.3
NetC5_2: C5.2 D1.2 IC1.29 | length 30.2
  Top Layer w0.254: C5.2 v1(56.145,61.047) ; D1.2 67.12,69.818 IC1.29
  Bottom Layer w0.254: v1(56.145,61.047) 65.611,70.513 D1.2
NetC6_2: C6.2 IC1.9 R6.1 TP2.1 | length 71.4
  Top Layer w0.254: TP2.1 59.5,35 IC1.9 ; R6.1 76.887,13.768 v1(78.395,15.276) ; v1(85,19) 86.572,20.572 87.644,20.572 C6.2
  Bottom Layer w0.254: TP2.1 65.134,19.366 ; v1(78.395,15.276) 75.525,18.147 66.353,18.147 65.134,19.366 ; v1(85,19) 75.113,19 74.747,19.366 65.134,19.366
NetC7_2: C7.2 IC2.5 R5.1 | length 36.4
  Top Layer w0.254: IC2.5 65.865,12.144 67,11.009 R5.1 ; C7.2 84.085,21.025 83.277,20.217 83.277,18.68 v1(85.634,16.323)
  Bottom Layer w0.254: IC2.5 67.717,12.838 83.602,12.838 85.634,14.87 v1(85.634,16.323)
NetC10_2: C10.2 IC1.10 R12.1 TP3.1 | length 26.8
  Top Layer w0.254: TP3.1 60,31 C10.2 ; IC1.10 61.581,42.041 61.581,34.326 63.13,32.777 65.221,32.777 65.983,32.015 C10.2 ; R12.1 65.5,28.484 65.983,28.967 C10.2
NetC11_2: C11.2 IC2.3 R11.1 | length 9.5
  Top Layer w0.254: IC2.3 68.405,23.582 70,25.177 R11.1 70,28.535 70.379,28.914 C11.2
NetC12_1: 
NetC12_2: 
NetC14_1: 
NetC15_1: 
NetC16_1: 
NetC17_1: C17.1 F1.2 U2.1 | length 28.1
  Top Layer w0.254: U2.1 18.34,68.34 22.554,72.554 27.923,72.554 28.659,73.29 F1.2 38.827,76.173 C17.1
NetCN1_2: CN1.2 R5.2 R10.1 R11.2 R13.2 | length 47
  Top Layer w0.254: CN1.2 65.366,6.5 67,4.866 ; R13.2 67,4.866 ; R11.2 72,25.279 72.655,24.624 77.1,24.624 77.887,23.836 77.887,20.915 78.192,20.61 78.192,17.664 78.887,17.664 R10.1 78.887,16.775 78.455,16.343 68.058,16.343 67.219,15.505 67.219,12.559 69,10.778 R5.2 69,7.243 67,5.243 67,4.866
NetCN2_1: CN2.1 L2.4 | length 22.6
  Bottom Layer w0.254: CN2.1 10.409,38 22.099,26.31 L2.4
NetCN2_2: CN2.2 L2.3 | length 39.5
  Bottom Layer w0.254: CN2.2 6.59,41.67 6.59,27.494 9.155,24.928 26.888,24.928 L2.3
NetCN3_1: CN3.1 K1.5 | length 23
  Top Layer w0.254: CN3.1 4.42,24.181 5.69,25.451 K1.5
NetCN3_2: CN3.2 K1.8 | length 16.1
  Top Layer w0.254: K1.8 5.69,10.31 CN3.2
NetCN4_1: CN4.1 CN6.2 | length 32.2
  Bottom Layer w0.254: CN4.1 18.909,5.091 47.091,5.091 CN6.2
NetCN4_2: CN4.2 F1.1 K1.4 R15.2 R22.1 T1.1 T2.3 | length 200.3
  Top Layer w0.254: R22.1 11.468,50 10.45,48.982 7.834,48.982 7.834,45.934 9.409,44.359 9.409,29.602 8.952,29.145 8.23,29.145 K1.4 8.23,28.408 7.301,27.479 7.301,14.87 9.536,12.635 21.22,12.635 22.58,11.275 CN4.2 24.218,4.862 44.842,4.862 45.96,5.98 45.96,18.882 ; F1.1 25.17,76.173 26.097,77.1 26.097,78.268 26.427,78.599 39.051,78.599 43.064,74.585 43.064,39.913 43.342,39.635 R15.2 43.342,26.247 42.404,25.309 42.404,22.211 40.829,22.211 40.372,22.668 ; T1.1 39.025,30.025 39.025,26.148 39.914,25.259 39.914,23.125 40.372,22.668 ; T2.3 45.96,18.882 ; 40.372,22.668 40.372,21.22 42.709,18.882 45.96,18.882
NetCN5_1: CN5.1 MAK1.3 MAK1.4 | length 35.9
  Top Layer w0.254: CN5.1 30.42,31.466 31.08,32.126 MAK1.4
  Bottom Layer w0.254: MAK1.3 MAK1.4
NetCN6_1: CN6.1 MAK1.1 MAK1.2 | length 56.1
  Top Layer w0.254: MAK1.1 33.66,45 36.435,42.226 36.435,39.533 31.659,34.758 31.659,30.863 31.486,30.69 31.486,15.297 40.283,6.5 CN6.1
  Bottom Layer w0.254: MAK1.2 MAK1.1
NetD2_2: D2.2 K1.12 T5.1 | length 39.8
  Top Layer w0.254: K1.12 15.85,19.02 17.41,17.46 D2.2
  Bottom Layer w0.254: T5.1 28.23,34.77 29.653,33.348 29.653,24.7 28.84,23.887 25.427,23.887 D2.2
NetIC1_1: IC1.1 R17.2 | length 7.3
  Top Layer w0.254: R17.2 36,37.933 39.18,41.113 IC1.1
NetIC1_2: IC1.2 J3.2 R1.2 | length 27.9
  Top Layer w0.254: J3.2 26.831,51.7 29.493,51.7 31.293,53.5 R1.2 36.87,53.5 41.72,48.65 IC1.2
NetIC1_7: IC1.7 J4.1 | length 7.8
  Top Layer w0.254: J4.1 54.42,41.592 IC1.7
NetIC1_8: IC1.8 J4.2 | length 7.8
  Top Layer w0.254: J4.2 56.96,41.592 IC1.8
NetIC1_11: IC1.11 R22.2 R23.1 ZD1.1 | length 67.4
  Top Layer w0.254: R23.1 R22.2 14.26,48 15.15,48.89 15.15,50.913 v1(14.172,51.891)
  Bottom Layer w0.254: v1(14.172,51.891) 16.313,54.032 ZD1.1 18.274,53.039 54.041,53.039 IC1.11
NetIC1_12: IC1.12 J2.1 | length 7.6
  Top Layer w0.254: J2.1 62.829,38.209 IC1.12
NetIC1_13: IC1.13 J2.2 | length 7.6
  Top Layer w0.254: J2.2 65.369,38.209 IC1.13
NetIC1_14: IC1.14 J2.3 | length 7.6
  Top Layer w0.254: J2.3 67.909,38.209 IC1.14
NetIC1_15: IC1.15 J2.4 | length 7.6
  Top Layer w0.254: J2.4 70.449,38.209 IC1.15
NetIC1_16: IC1.16 J2.5 | length 7.6
  Top Layer w0.254: J2.5 77.28,40.986 IC1.16
NetIC1_19: IC1.19 R24.1 | length 74.8
  Top Layer w0.254: R24.1 19.175,49.16 21.055,51.04 v1(25.817,51.04)
  Bottom Layer w0.254: v1(25.817,51.04) 53.351,51.04 60.768,43.623 60.768,42.175 61.809,41.134 83.534,41.134 IC1.19
NetIC1_20: IC1.20 J1.1 | length 39
  Bottom Layer w0.254: J1.1 74.411,67.423 70.115,67.423 69.632,66.94 69.632,63.943 73.62,59.955 73.62,56.32 IC1.20
NetIC1_21: IC1.21 J1.2 | length 17.3
  Bottom Layer w0.254: J1.2 78.755,60.539 84.831,60.539 IC1.21
NetIC1_22: IC1.22 J1.3 | length 17.3
  Bottom Layer w0.254: J1.3 76.951,59.803 83.028,59.803 IC1.22
NetIC1_23: IC1.23 J6.2 | length 5.1
  Top Layer w0.254: IC1.23 82.36,58.85 J6.2
NetIC1_24: IC1.24 J6.3 | length 5.1
  Top Layer w0.254: IC1.24 82.754,60.865 J6.3
NetIC1_27: IC1.27 J8.1 | length 24.1
  Top Layer w0.254: IC1.27 72.97,59.064 74.636,60.731 74.636,69.074 73.061,70.648 73.061,75.843 73.608,76.389 75.603,76.389 J8.1
NetIC1_28: IC1.28 J8.4 | length 26.3
  Top Layer w0.254: IC1.28 70.811,56.78 73.3,56.78 73.62,57.1 73.62,58.685 73.976,59.041 75.83,59.041 77.176,60.387 77.176,72.276 J8.4
NetIC1_30: IC1.30 J8.5 | length 22.8
  Top Layer w0.254: IC1.30 64.58,60.565 64.425,60.719 64.425,70.291 J8.5
NetIC1_33: IC1.33 J5.1 | length 10.3
  Bottom Layer w0.254: IC1.33 58.146,59.117 62.996,59.117 J5.1
NetIC1_34: IC1.34 J5.2 | length 10.3
  Bottom Layer w0.254: IC1.34 56.292,59.803 61.141,59.803 J5.2
NetIC1_35: IC1.35 J7.4 R3.1 | length 76.8
  Top Layer w0.254: R3.1 45.833,66.432 46.569,67.169 49.668,67.169 51.167,65.67 51.167,58.644 IC1.35
  Bottom Layer w0.254: J7.4 50.43,73.04 51.88,71.59 IC1.35
NetIC1_36: IC1.36 J7.2 R2.1 | length 76.2
  Top Layer w0.254: R2.1 48.493,62.564 47.407,61.479 44.664,61.479 44.664,59.65 47.62,59.65 IC1.36
  Bottom Layer w0.254: J7.2 6.266,74.306 4.177,74.306 3.796,73.925 3.796,63.155 10.146,56.805 48.215,56.805 IC1.36
NetIC1_37: IC1.37 J7.3 | length 55.4
  Bottom Layer w0.254: J7.3 6.249,71.791 45.53,71.791 46.8,70.521 IC1.37
NetIC1_38: IC1.38 J7.5 | length 49.8
  Bottom Layer w0.254: J7.5 6.223,69.277 41.972,69.277 44.26,66.989 IC1.38
NetIC1_39: IC1.39 J7.7 | length 58.3
  Top Layer w0.254: J7.7 3.796,69.164 3.796,71.385 4.202,71.791 10.679,71.791 15.099,67.372 22.414,67.372 23.362,68.32 23.362,70.142 23.612,70.392 25.434,70.392 27.042,72 31.324,72 37.979,65.345 37.979,57.415 38.614,56.78 40.569,56.78 IC1.39
NetIC1_40: IC1.40 J7.9 TP1.1 | length 43.1
  Top Layer w0.254: IC1.40 39.18,58.736 TP1.1
  Bottom Layer w0.254: J7.9 9.031,61.389 TP1.1
NetIC2_1: IC2.1 R9.1 R12.2 | length 19.9
  Top Layer w0.254: v1(65.67,24.268) 67.067,25.665 67.5,25.665 R12.2 ; IC2.1 75.017,22.31 75.327,22 R9.1
  Bottom Layer w0.254: v1(65.67,24.268) 64.679,23.277 64.679,21.474 65.035,21.118 73.066,21.118 73.485,21.538 IC2.1
NetIC2_2: IC2.2 R8.2 R14.2 | length 48.5
  Top Layer w0.254: v1(74.325,6.253) R14.2 R8.2
  Bottom Layer w0.254: IC2.2 73.767,25.132 84.325,25.132 87.331,22.125 87.331,13.032 80.553,6.253 v1(74.325,6.253)
NetIC2_6: IC2.6 R4.2 R7.2 | length 18.4
  Top Layer w0.254: IC2.6 72.325,10.77 R4.2 72.325,7.656 72.655,7.326 75.195,7.326 75.881,8.012 75.881,9.473 76.249,9.841 78.518,9.841 78.887,9.473 R7.2
NetIC2_7: IC2.7 R4.1 R6.2 | length 13.8
  Top Layer w0.254: IC2.7 73.788,11.847 ; R4.1 74.325,11.31 73.788,11.847 ; R6.2 78.887,11.847 73.788,11.847
NetIC3_2: 
NetIC3_3: 
NetIC3_4: 
NetIC3_5: 
NetIC3_6: 
NetIC3_7: 
NetIC3_8: 
NetIC3_9: 
NetIC3_12: 
NetIC3_13: 
NetIC3_14: 
NetIC3_15: 
NetIC3_17: 
NetIC3_18: 
NetL2_1: L2.1 T2.4 TP5.1 | length 42.6
  Top Layer w0.254: TP5.1 52.294,30 58.889,23.404 T2.4
  Bottom Layer w0.254: L2.1 31.435,24.395 43.895,24.395 TP5.1
NetR8_1: R8.1 R9.2 | length 18.9
  Top Layer w0.254: R8.1 78.887,4.428 80.016,5.558 80.016,19.117 78.887,20.246 R9.2
NetR15_1: R15.1 T1.2 T3.1 T4.2 | length 32.5
  Top Layer w0.254: T3.1 32.04,30.08 32.04,25.386 34.27,23.156 T4.2 ; T1.2 41.27,33.056 41.342,33.128 R15.1
  Bottom Layer w0.254: T3.1 35.88,33.92 39.182,33.92 41.27,31.832 T1.2
NetR16_1: R16.1 T2.1 | length 4.8
  Top Layer w0.254: R16.1 45.579,23.5 46.041,23.962 T2.1
NetR16_2: R16.2 T1.3 T4.3 | length 48.8
  Top Layer w0.254: T1.3 41.5,26.96 R16.2
  Bottom Layer w0.254: T4.3 49.16,17.788 50.735,19.363 50.735,31.456 49.795,32.396 49.16,32.396 45.224,28.46 T1.3
NetR17_1: R17.1 R18.2 T3.2 | length 15.7
  Top Layer w0.254: R18.2 37,27.04 T3.2 38,33.5 R17.1
NetR24_2: R24.2 R25.1 T5.2 | length 13.9
  Top Layer w0.254: R24.2 17.175,44.658 19.175,42.658 R25.1 19.175,38.06 19.77,37.465 T5.2
pads on no net: IC1.3 IC1.4 IC1.25 IC1.26 J7.6 J7.8 K1.3 K1.10

## Polygon pours and split planes (outlines as drawn)
GND on Bottom Layer "GND_L02_P000" (solid, pour order 0): 1,1 91,1 91,81 1,81 1,5

## Silkscreen, mask and mechanical layers (free items; w line width, h text height)
Top Overlay:
  text "Solderstation" at 93.254,68.246 h1.2 r270
  text "Robert Jansen" at 93.254,46.246 h1.2 r270
Top Solder:
  lines w0.2: 21.5,39.5 34.5,39.5 ; 21.5,42.5 34.5,42.5
  lines w0.254: 21.5,39.5 cw(c22.125,41) 21.5,42.5 ; 34.5,39.5 ccw(c34.5,41) 34.5,42.5
Board:
  the board outline again, w0.2

## Text inside footprints (layer, text, board x,y; h text height)
J8: Top Overlay "1" at 79,77 h1.02